# Altium PCB toasterBigBoard.PcbDoc
Units mil, origin at the board's own origin, x right, y up, seen from the top; angles counter-clockwise.
Board outline 12550 x 9550 mil, 2 copper layers (Top Layer, Bottom Layer); 34 components, 12 nets, 82 pads, 0 vias.
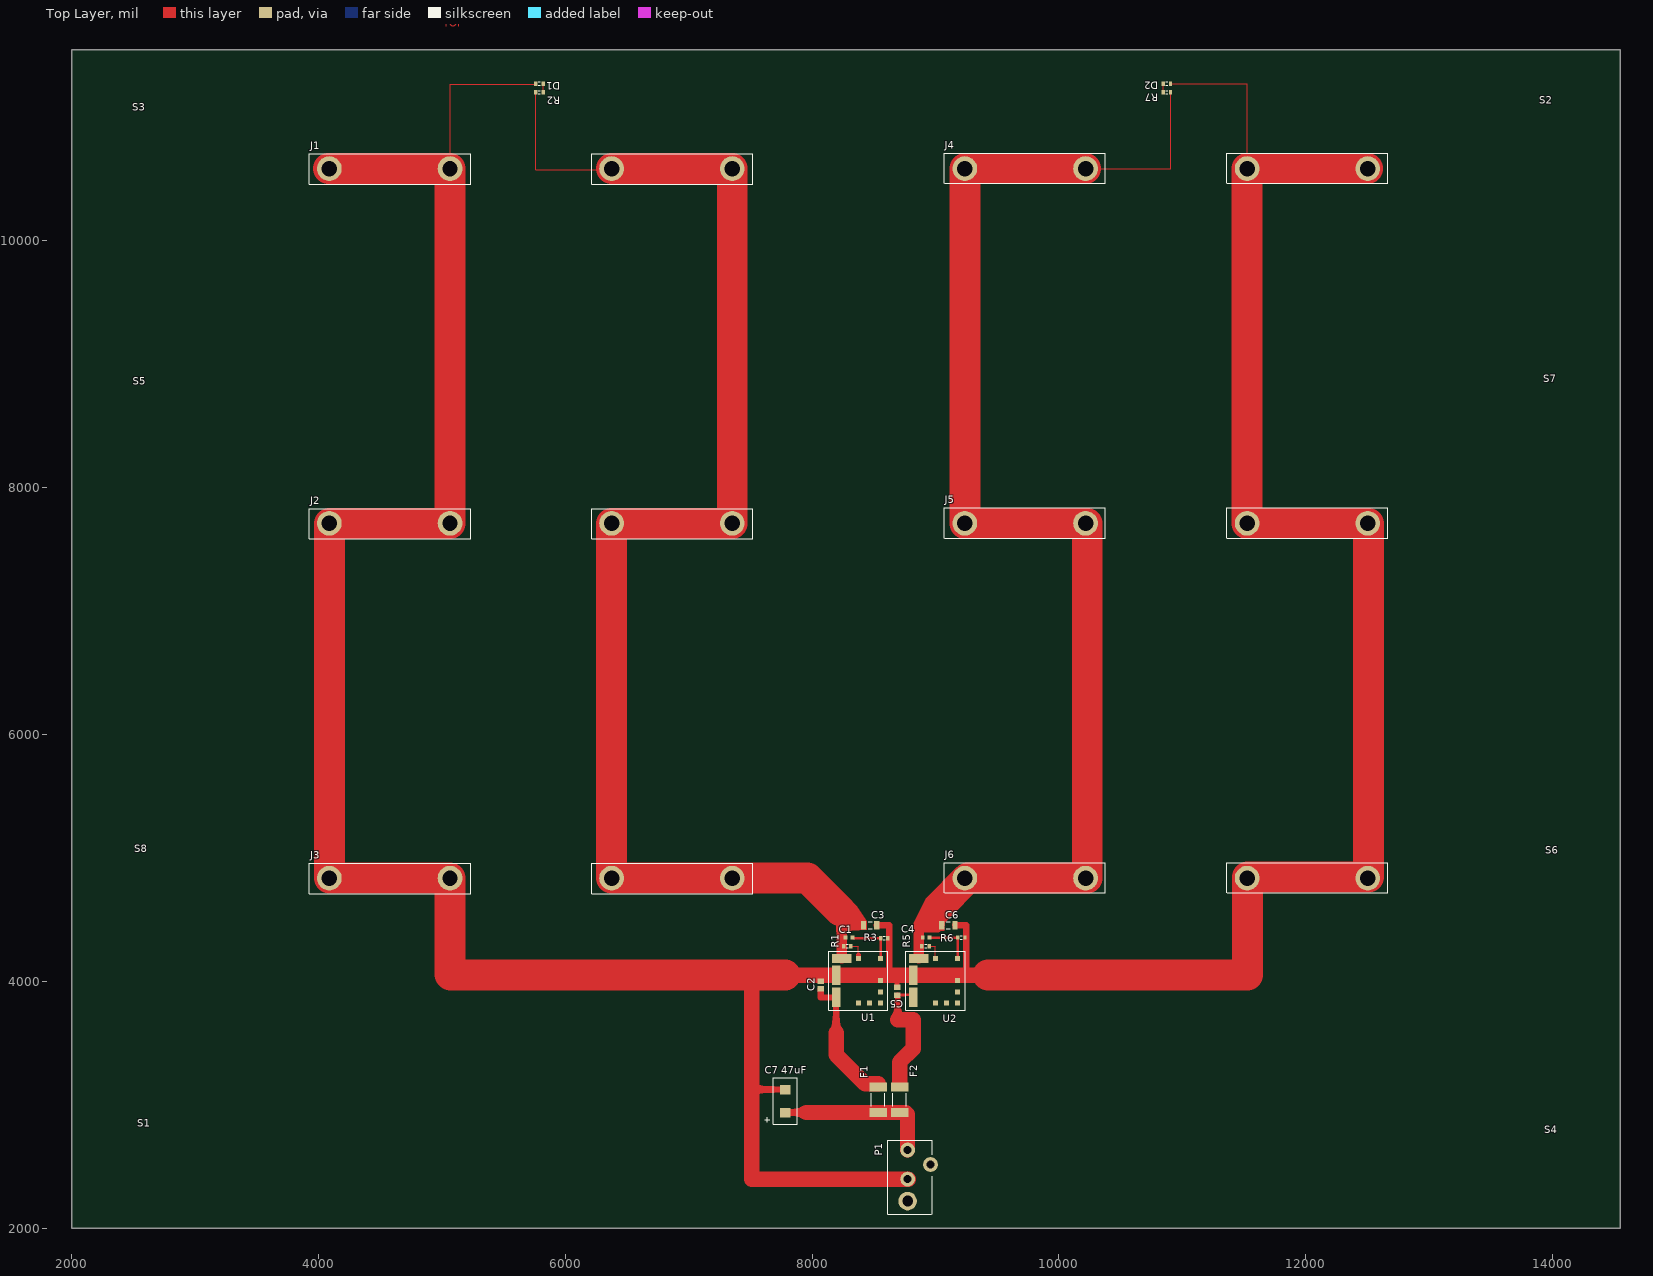
[diagram p0: Top Layer view]
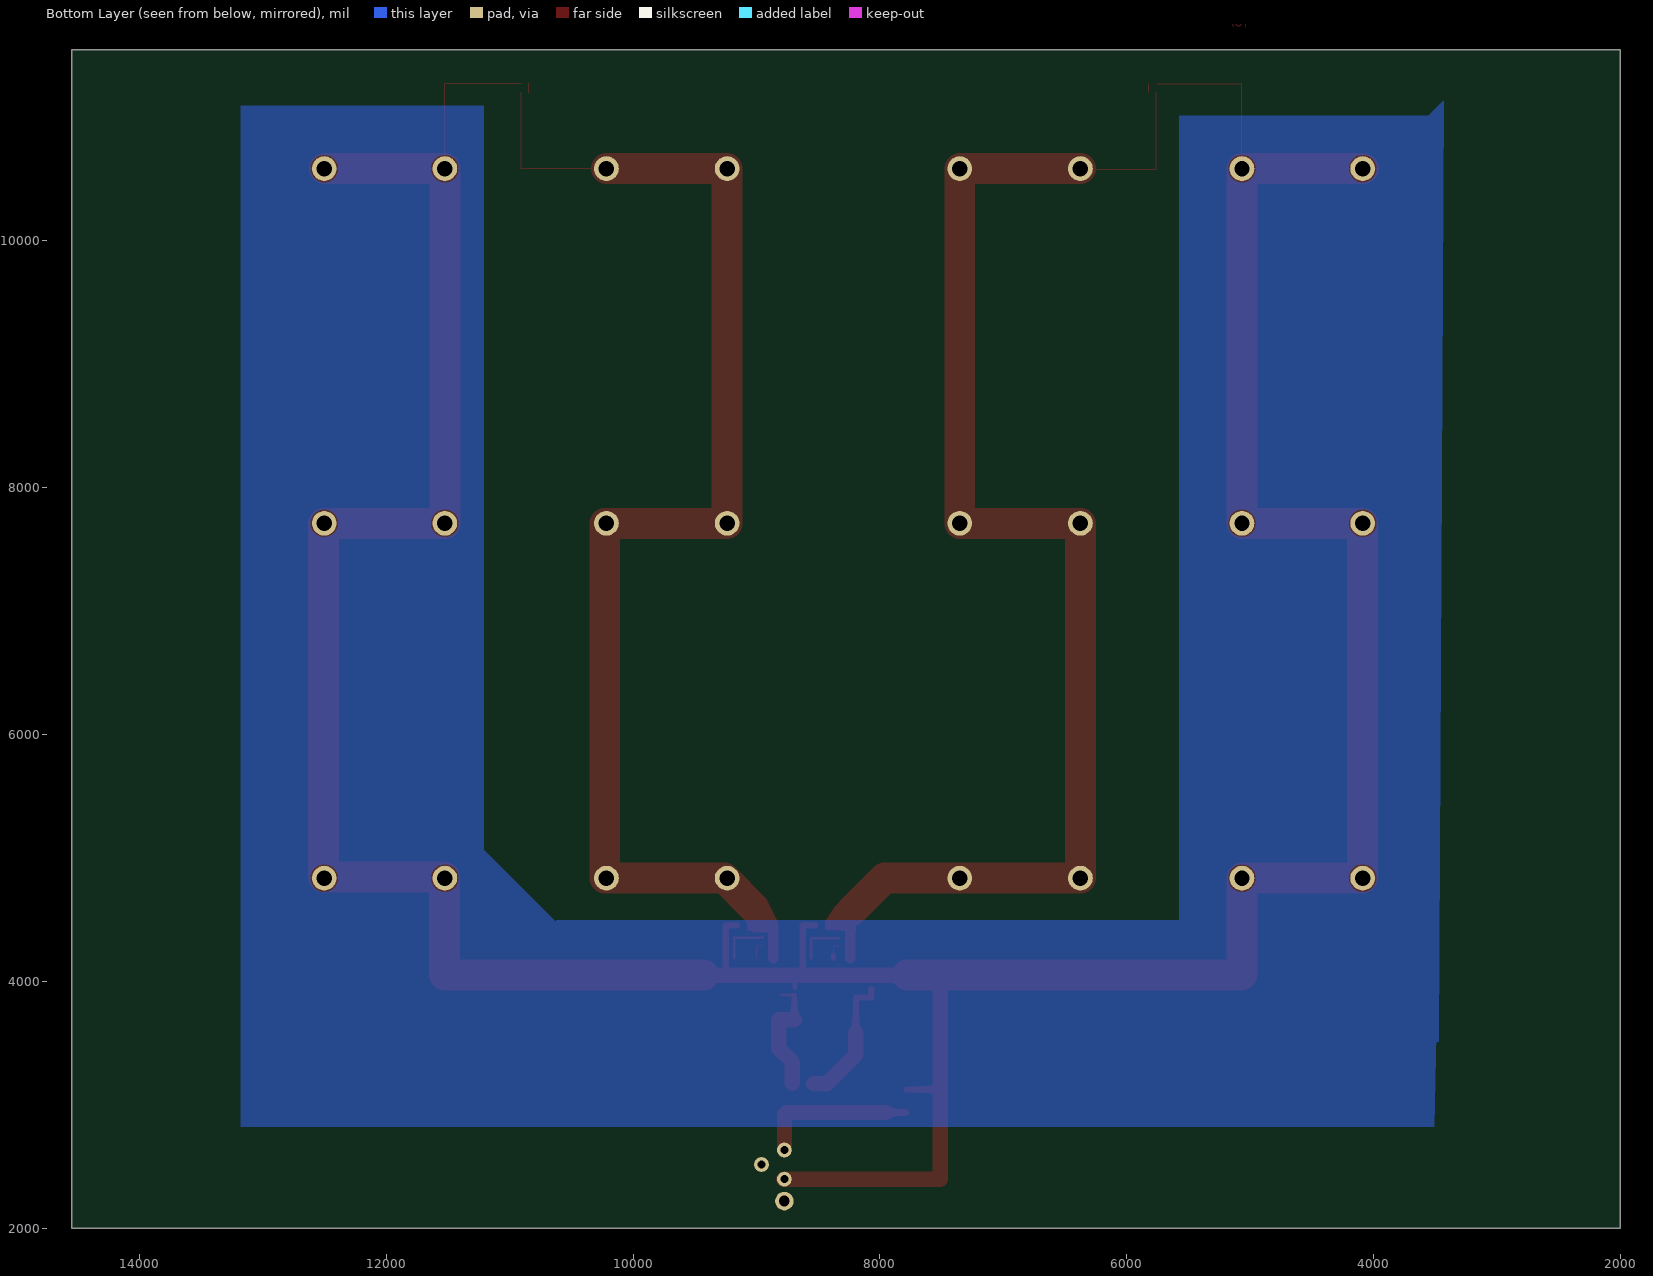
[diagram p1: Bottom Layer view, seen from below]

## Layer stack, top to bottom
Top Solder: solder mask 0.4, Solder Resist, Dk 3.5
Top Layer: signal copper 1.4
Dielectric1: dielectric 12.6, FR-4, Dk 4.8
Bottom Layer: signal copper 1.4
Bottom Solder: solder mask 0.4, Solder Resist, Dk 3.5

## Board outline
2000,2000 14550,2000 14550,11550 2000,11550

## Design rules (kind name [scope] priority, off if disabled: settings)
Clearance [All] p1: gap=10
HoleSize [All] p1: absolutevalues=TRUE maxlimit=500 minlimit=1 maxpercent=80.000 minpercent=20.000
PolygonConnect [All] p1: connectstyle=Relief reliefconductorwidth=10 reliefentries=4 polygonreliefangle="90 Angle" airgapwidth=10
RoutingVias [All] p1: holewidth=28 width=50 viastyle="Through Hole" minholewidth=28 minwidth=50 maxholewidth=28 maxwidth=50
SilkToSolderMaskClearance SilkscreenOverComponentPads [IsPad] p1: minsilkscreentomaskgap=3 clearancetoexposedcopper=TRUE
SolderMaskExpansion [All] p1: expansion=4
Width "Schematic Width Constraint_5" [InNet('GND')] p1: maxlimit=250 minlimit=8 preferedwidth=125 minimp=50.000000 maximp=50.000000 favimp=50.000000
Width "Schematic Width Constraint_7" [InNet('6.25VOUT_2')] p2: maxlimit=250 minlimit=8 preferedwidth=125 minimp=50.000000 maximp=50.000000 favimp=50.000000
Width "Schematic Width Constraint_6" [InNet('NetC2_2')] p3: maxlimit=250 minlimit=20 preferedwidth=125 minimp=50.000000 maximp=50.000000 favimp=50.000000
Width "Schematic Width Constraint_4" [InNet('12V')] p4: maxlimit=250 minlimit=20 preferedwidth=125 minimp=50.000000 maximp=50.000000 favimp=50.000000
Width "Schematic Width Constraint_1" [InNet('NetC5_2')] p5: maxlimit=250 minlimit=20 preferedwidth=125 minimp=50.000000 maximp=50.000000 favimp=50.000000
Width "Schematic Width Constraint_3" [InNet('NetC1_2')] p6: maxlimit=120 minlimit=20 preferedwidth=85 minimp=50.000000 maximp=50.000000 favimp=50.000000
Width "Schematic Width Constraint_2" [InNet('NetC4_2')] p7: maxlimit=120 minlimit=20 preferedwidth=85 minimp=50.000000 maximp=50.000000 favimp=50.000000
Width "Schematic Width Constraint" [InNet('6.25VOUT_1')] p8: maxlimit=250 minlimit=8 preferedwidth=125 minimp=50.000000 maximp=50.000000 favimp=50.000000
Width [All] p9: maxlimit=60 minlimit=10 preferedwidth=10 minimp=50.000000 maximp=50.000000 favimp=50.000000
28 further rules are at their usual default settings.

## Components (designator, comment, footprint, x,y, rotation, side; value= is the part's Value field where it differs from the comment)
C1 "CTUNE" CAPC1608L 8300,4355 r0 top
C2 "CIN" CAPC2012L 8070,3970 r270 top
C3 "COUT" CAPC3216L 8470,4455 r180 top
C4 "CTUNE" CAPC1608L 8925,4355 r0 top
C5 "CIN" CAPC2012L 8690,3920 r270 top
C6 "COUT" CAPC3216L 9105,4455 r180 top
"C7 47uF" "CapTant6032-28" CAPTANT6032-28 7783,3029 r90 top
D1 "LED Power 1" SURFACEMOUNT(603) 5790.47,11275 r180 top
D2 "LED Power 2" SURFACEMOUNT(603) 10875.47,11275 r0 top
F1 "PTC" J1-1812 8535,3040 r90 top
F2 "PTC" J1-1812 8710,3040 r90 top
J1 "ToasterChargerProng" TOASTERCHARGERPRONG 5720.65,10586.5 r180 top
J2 "ToasterChargerProng" TOASTERCHARGERPRONG 5720.65,7711.5 r180 top
J3 "ToasterChargerProng" TOASTERCHARGERPRONG 5720.65,4836.5 r180 top
J4 "ToasterChargerProng" TOASTERCHARGERPRONG 10870.9,10586.5 r0 top
J5 "ToasterChargerProng" TOASTERCHARGERPRONG 10870.9,7711.5 r0 top
J6 "ToasterChargerProng" TOASTERCHARGERPRONG 10870.9,4836.5 r0 top
P1 "PJ-059A" PJ-059A 8782,2421 r90 top
R1 "RTUNE" J1-0603 8285,4285 r0 top
R2 "Resistor" J1-0603 5790.47,11205 r0 top
R3 "RTRIM" J1-0603 8585,4350 r180 top
R5 "RTUNE" J1-0603 8920,4285 r0 top
R6 "RTRIM" J1-0603 9210,4355 r180 top
R7 "Resistor" J1-0603 10875,11205 r180 top
S1 "ToasterChargerZiptie" TOASTERCHARGERZIPTIEREVISED2 2562.5,2625 r0 top
S2 "ToasterChargerZiptie" TOASTERCHARGERZIPTIEREVISED2 13987.5,10925 r0 top
S3 "ToasterChargerZiptie" TOASTERCHARGERZIPTIEREVISED2 2562.5,10925 r0 top
S4 "ToasterChargerZiptie" TOASTERCHARGERZIPTIEREVISED2 13987.5,2625 r0 top
S5 "ToasterChargerZiptie" TOASTERCHARGERZIPTIEREVISED2 2562.5,8675 r180 top
S6 "ToasterChargerZiptie" TOASTERCHARGERZIPTIEREVISED2 13987.5,4875 r180 top
S7 "ToasterChargerZiptie" TOASTERCHARGERZIPTIEREVISED2 13987.5,8675 r180 top
S8 "ToasterChargerZiptie" TOASTERCHARGERZIPTIEREVISED2 2562.5,4875 r180 top
U1 "DCDC-APXK004A0X" DCDC-APXK004A0X 8375,4005 r90 top locked
U2 "DCDC-APXK004A0X" DCDC-APXK004A0X 9000,4005 r90 top locked

## Footprints (in the part's own frame and the unit in brackets; to place one, negate y for a bottom-side part, rotate by r counter-clockwise, add the part's x,y. Pads: shape width x height; smd on the part's side, far side on the other; paste and mask are expansions set on the pad)
CAPC1608L [mm] "Chip Capacitor, Body 1.6x0.8mm, IPC High Density"
  rect 0.8x0.9 smd: 1(-0.7,0) 2(0.7,0)
  body extent -0.87,-0.48 0.87,0.48, height 1.3
CAPC2012L [mm] "Chip Capacitor, Body 2.0x1.3mm, IPC High Density"
  rect 1.1x1.4 smd: 1(-0.8,0) 2(0.8,0)
  body extent -1.1,-0.72 1.1,0.72, height 1.4
CAPC3216L [mm] "Chip Capacitor, Body 3.2x1.6mm, IPC High Density"
  rect 1.1x1.7 smd: 1(-1.35,0) 2(1.35,0)
  silkscreen extent -0.4,-0.75 0.4,0.75, body extent -1.7,-0.9 1.7,0.9, height 1.3
CAPTANT6032-28 [mm] "Standard capacitor sized at a C Case (6.0 x 3.2 mm)"
  rect 1.99x2.13 smd: 1(-2.36,0) 2(2.36,0)
  silkscreen extent -4.79,-2.5 4.79,4.22, body extent -2.9,-1.55 2.9,1.5, height 2.79
DCDC-APXK004A0X [mm] "Footprint for the rone charger's DC/DC converter"
  rect 1.01x1.01 smd: 1(-4.575,0.005) 5(4.575,0.005) 6(4.575,-4.575) 7(0.005,-4.575) 8(-2.285,-4.575) 9(-4.575,-4.575) 10(-4.575,-2.285)
  rect 4.07x1.77 smd: 2(-3.425,4.575) 3(1.145,4.575)
  rect 1.77x4.07 smd: 4(4.575,3.435)
  silkscreen extent -6.09,-6.09 6.1,6.1, body extent -6.09,-6.09 6.1,6.1, height 7.24
J1-0603 [mm] "Chip Resistor, Body 1.6x0.8mm, IPC High Density"
  rect 0.7x0.9 smd: 1(-0.75,0) 2(0.75,0)
  silkscreen extent -0.2,-0.35 0.2,0.35, body extent -0.85,-0.48 0.85,0.48, height 0.9
J1-1812 [mm] "Standard surface mount chip - 45 x 32 mm"
  rect 1.85x3.6 smd: 1(-2.615,0) 2(2.615,0)
  silkscreen extent -1.3,-1.4 1.3,1.4
PJ-059A [mil] "DC power jack, rated at 16 V. For use in Toaster Charger."
  round 120 hole 63: 1(212,7.5) 2(-24,7.5) 3(94,-177.5)
  round 150 hole 87: 4(-202,7.5)
  silkscreen extent -310,-190 291,170, body extent -305,-185 285,165, height 433
SURFACEMOUNT(603) [mm]
  rect 0.7x0.9 smd: 1(-0.75,0) 2(0.75,0)
  silkscreen extent -0.2,-0.35 0.2,0.35, body extent -0.85,-0.48 0.85,0.48, height 0.9
TOASTERCHARGERPRONG [mil] "PCB footprint for toaster Charger clips"
  round 200 hole 125: 1(-1632.6,0) 2(-654.6,0) 3(654.6,0) 4(1632.6,0)
  silkscreen extent -1799,-120 1794,126
TOASTERCHARGERZIPTIEREVISED2 [mil] "2nd revision for Ziptie for Toaster charger, now a cut on the mechanical layer."

## Part data
C1 C2 C3 C4 C5 C6: library part Cap, "Capacitor"
"C7 47uF": "Polarized Tantalum Capacitor for use in Toaster Charger"
D1 D2: library part LED
F1 F2: library part PTC_FUSE, "Fuse"
J1 J2 J3 J4 J5 J6: "Charger Prong Footprint for Toaster Charger"
R1 R3 R5 R6: library part Resistor, "Resistor"
S1 S2 S3 S4 S5 S6 S7 S8: "Slot for Ziptie connection between PCB and Toaster Charger"
U1 U2: "DC/DC converter for the rone charger"

## Nets (pads, with @x,y where several pads share a name; then routed paths per layer and width w, separated by ;. In a path a pad name is that pad's centre, name@x,y a point inside that pad or via, vN(x,y) a via of type N, cw(c..) or ccw(c..) an arc to the next point about the centre after c; other vN are vias at no path point)
6.25VOUT_1: C1.1 C3.2 J1.1 J1.2 J2.1 J2.2 J3.1 J3.2 R1.1 R2.1 U1.4 | length 11149.9
  Top Layer w8: R2.1 5760.94,10575.94 J1.2@6364.69,10575.94
  Top Layer w85: U1.4 8239.76,4438.15
  Top Layer w250: J1.2 J1.1 J2.1 J2.2 J3.2 7710.9,4836.5 7963.5,4836.5 8225,4575
6.25VOUT_2: C4.1 C6.2 J4.1 J4.2 J5.1 J5.2 J6.1 J6.2 R5.1 R7.1 U2.4 | length 10890.2
  Top Layer w8: J4.2 10905,10586.5 R7.1@10905,11205
  Top Layer w85: U2.4 8864.76,4424.76 8880,4440 9015,4440 9015,4465 9025,4475 9025,4600
  Top Layer w250: 9025,4600 9261.5,4836.5 10230,4836.5 10230,7711.5 J5.1 J4.1 J4.2
12V: "C7 47uF.1" F1.1 F2.1 P1.1 | length 1279.2
  Top Layer w20: F2.1@8759.95,2937 8760,2937.05 F2.1@8768.95,2946
  Top Layer w50: 7783.96,2937.05 7953.05,2937.05
  Top Layer w125: 7953.05,2937.05 F1.1 F2.1 F2.1@8760,2937.05 ; P1.1@8773.5,2633 F2.1@8773.5,2923.45
GND: "C7 47uF.2" C2.1 C3.1 C5.1 C6.1 D1.2 D2.2 J1.3 J1.4 J2.3 J2.4 J3.3 J3.4 J4.3 J4.4 J5.3 J5.4 J6.3 J6.4 P1.2 R3.1 R6.1 U1.3 U1.7 U2.3 U2.7 | length 32348.4
  Top Layer w8: J1.3 5066.05,11271.05 D1.2@5756.99,11271.05 ; D2.2 11525.5,11275 J4.3
  Top Layer w40: C5.1@8690,3949.53 8690,4025.08
  Top Layer w50: 7510,3123.91 7782,3123.91 ; C3.1 8625,4455 8625,4050.08 ; C6.1 9250,4455 9250,4050.08
  Top Layer w125: 7510,4045.01 7510,3123.91 7510,2397 P1.2 P1.2@8780.5,2397 ; 7783,4048 7785,4050 8069.99,4050.05 U1.3 8625,4050.08 ; 8645,4050.08 U2.3 9426,4050.08
  Top Layer w250: J1.4@4080,10586.5 J1.4 J1.3 J2.3 J2.4 J3.4 J3.3 5066.05,4054.03 ; 5070,4050.08 7510,4050.01 7783,4050 ; 9426,4050.08 11529,4050.08 11529,4845 12510,4845 12510,7711.5 J5.3 J4.3 J4.4
NetC1_2: C1.2 R3.2 U1.6 | length 387.4
  Top Layer w20: C1.2@8332.56,4350 R3.2 ; U1.6 R3.2@8555.12,4349.65
NetC2_2: C2.2 F1.2 U1.2 | length 1095.7
  Top Layer w50: C2.2 8070,3870 8094.68,3870 ; 8094.84,3870.16 U1.2 8195,3584.95
  Top Layer w125: 8195,3584.95 8195,3405 8430,3170 F1.2@8535,3170
NetC4_2: C4.2 R6.2 U2.6 | length 398.4
  Top Layer w20: C4.2 R6.2 ; U2.6 R6.2@9180.12,4354.65 ; R6.2@9180.12,4354.65 R6.2 ; R6.2@9180.12,4354.65 R6.2
NetC5_2: C5.2 F2.2 U2.2 | length 994.4
  Top Layer w20: C5.2@8693,3890.47 U2.2@8799.57,3890.47
  Top Layer w40: 8693,3690 C5.2@8693,3890.47
  Top Layer w125: 8693,3690 8819.88,3690 8819.88,3454.88 8710,3345 F2.2@8710,3175
NetD1_1: D1.1 R2.2 | length 70
  Top Layer w10: R2.2 D1.1
NetD2_1: D2.1 R7.2 | length 77
  Top Layer w10: R7.2@10844.94,11202 D2.1@10844.94,11279
NetR1_2: R1.2 U1.5 | length 157.3
  Top Layer w10: R1.2 8370,4285 8374.8,4280.2 8374.8,4215.2
  Top Layer w40: U1.5 8374.8,4215.2
NetR5_2: R5.2 U2.5 | length 147.3
  Top Layer w10: R5.2 8995,4285 8999.8,4280.2 U2.5
pads on no net: P1.3 P1.4 U1.1 U1.8 U1.9 U1.10 U2.1 U2.8 U2.9 U2.10

## Polygon pours and split planes (outlines as drawn)
GND on Bottom Layer "GND" (solid, pour order 18): 10616.48,2820 13180,2820 13180,11095 13190,11105 13180,11095 11210,11095 11210,5065 10025,3880
GND on Bottom Layer "GND" (solid, pour order 14): 3471.48,4530 3506.48,4495 10621.48,4495 10621.48,2885 10651.48,2855 10616.48,2820 3506.48,2820
GND on Bottom Layer "GND" (solid, pour order 10): 3430,11140 3555,11015 5575,11015 5575,3665 5660,3580 5590,3510 3470,3510

## Other copper
Top Layer:
  region net 6.25VOUT_2: 8925,4675 9051.25,4550 9120,4520 9075,4475 9070,4410 8825,4400 8825,4475
  region net 6.25VOUT_1: 8172.72,4586.4 8329.44,4622.56 8325.62,4645.62 8361.02,4610.22 8445,4487.11 8445,4420 8195,4400 8195,4480 8157.72,4554.55
  text "TOP" at 5010,11735 h60

## Silkscreen, mask and mechanical layers (free items; w line width, h text height)
Mechanical 1:
  the board outline again, w10